# Altium PCB RadioPod_4.PcbDoc
Units mm, origin at the board's own origin, x right, y up, seen from the top; angles counter-clockwise.
Board outline 48.8 x 62.2 mm, 3 copper layers (Top Layer, GND, Bottom Layer), stack 0.488 mm thick; 79 components, 117 nets, 432 pads, 87 vias.
Unrouted connection lines stored in the file: 5.
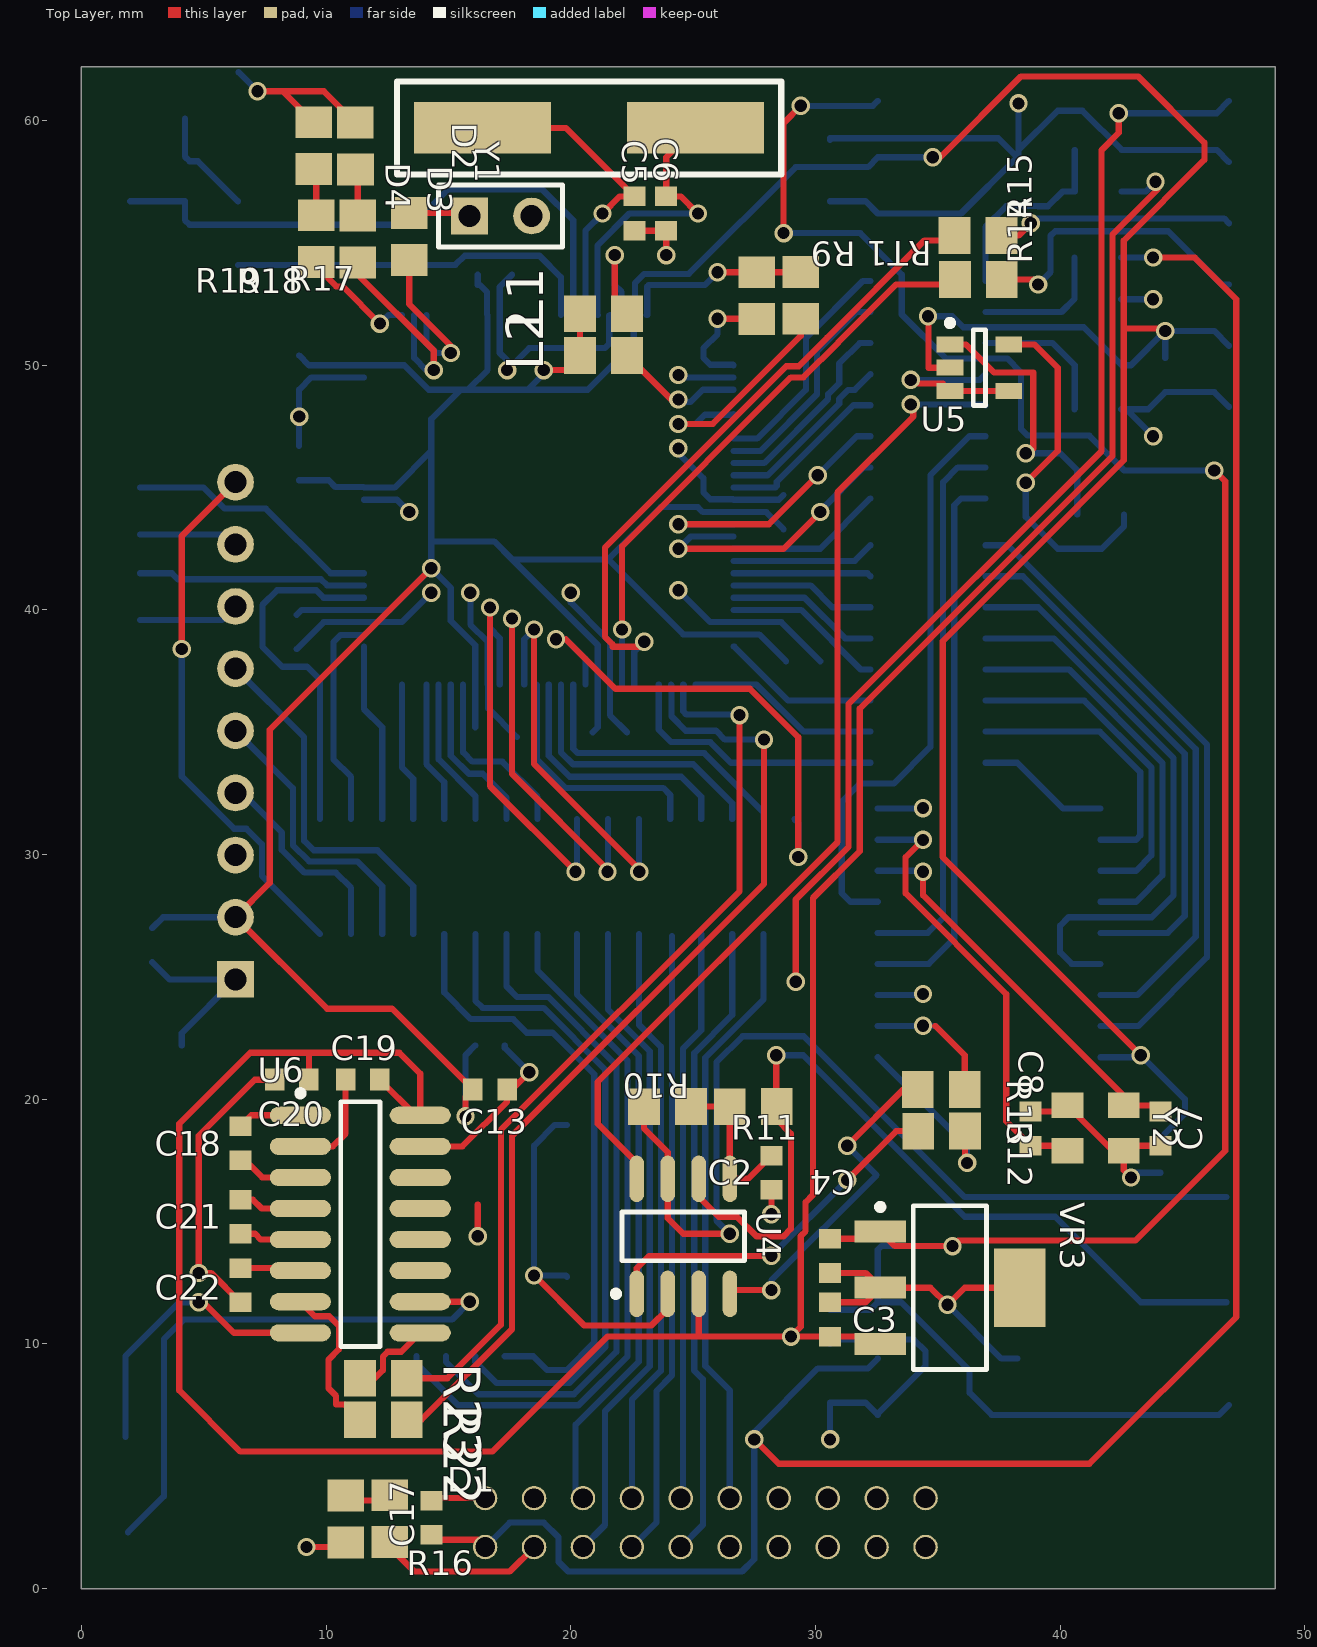
[diagram p0: Top Layer view]
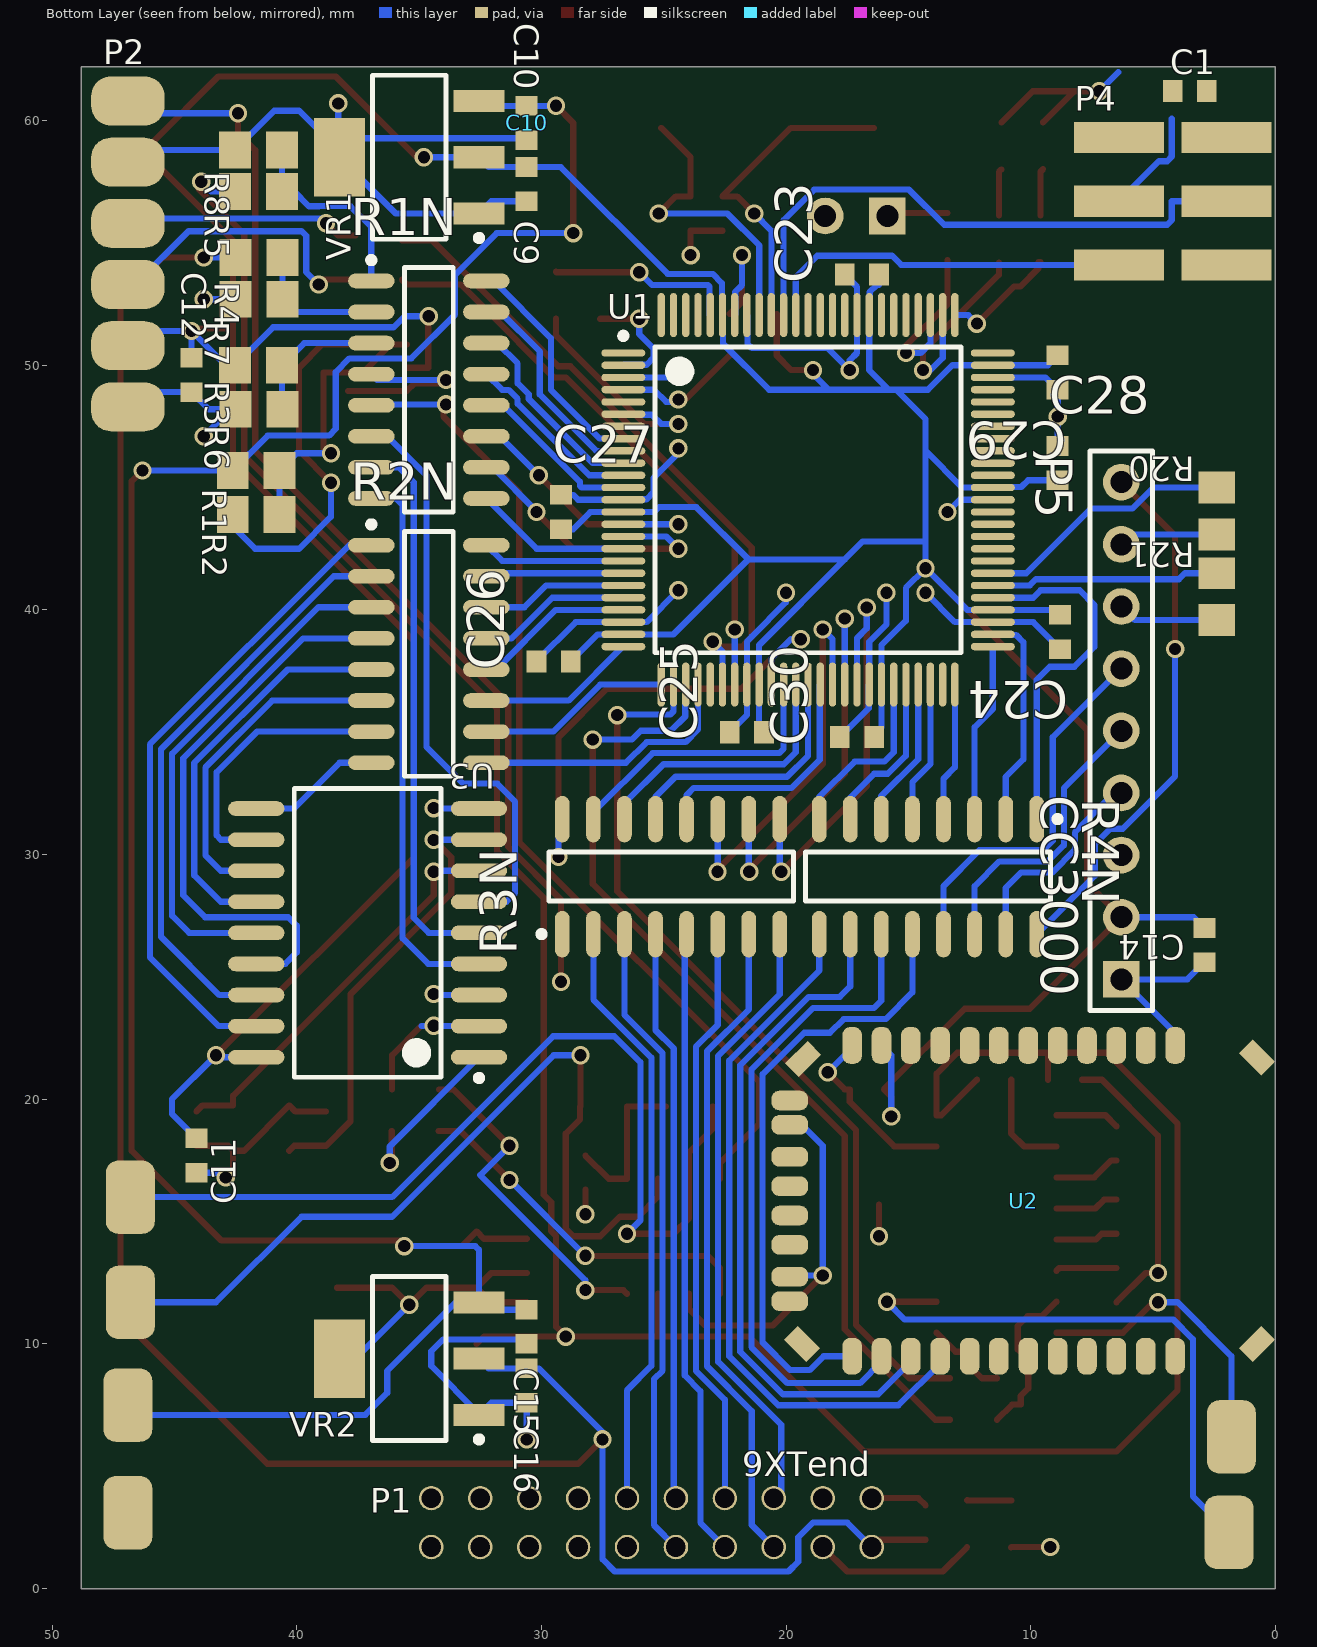
[diagram p1: Bottom Layer view, seen from below]
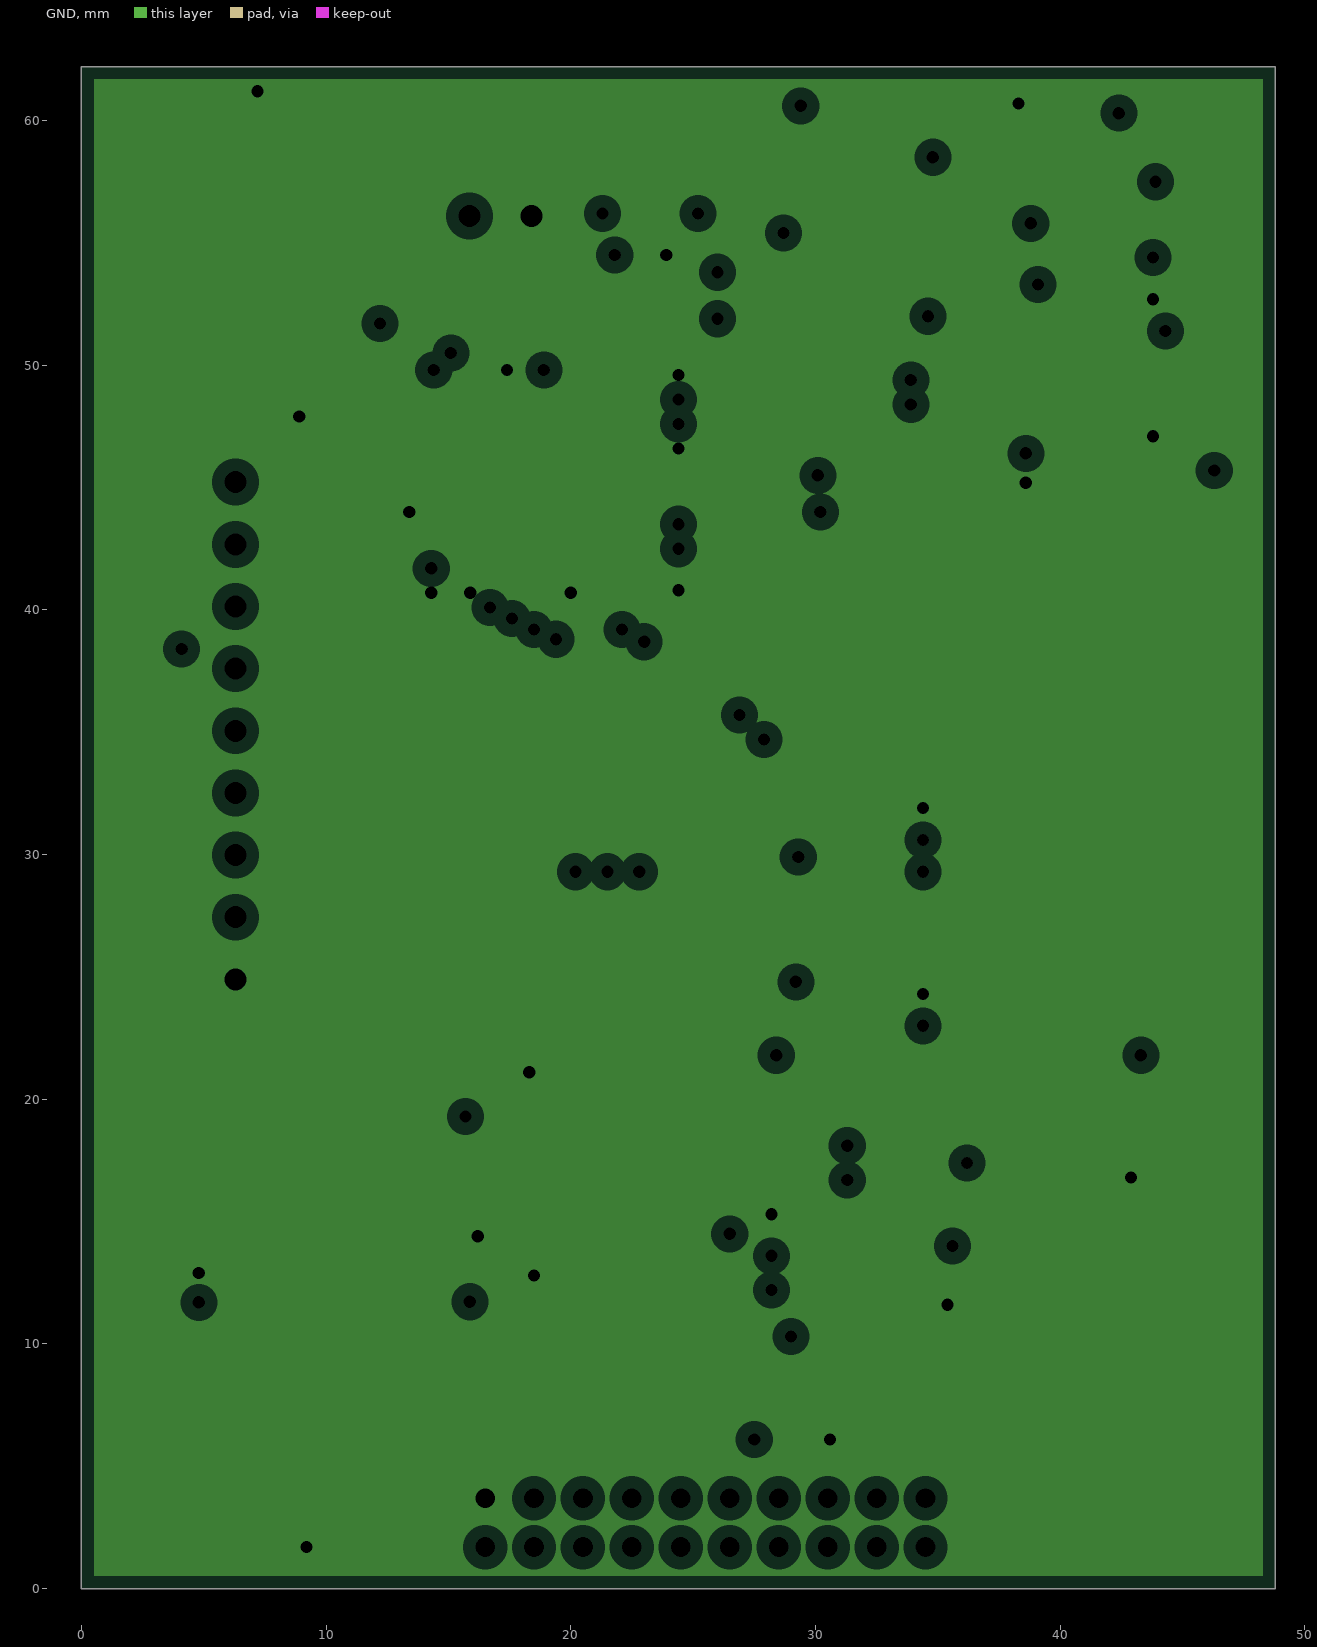
[diagram p2: GND, clearances drawn from the general rule]

## Layer stack, top to bottom
Top Solder: solder mask 0.0102, Solder Resist, Dk 3.5
Top Layer: signal copper 0.0356
Dielectric 1: core 0.254, FR-4, Dk 4.2
GND: plane copper 0.036, net GND
Dielectric 2: prepreg 0.127, Dk 4.2
Bottom Layer: signal copper 0.0356
Bottom Solder: solder mask 0.0102, Solder Resist, Dk 3.5

## Board outline
0,0 0,62.2 48.8,62.2 48.8,0

## Design rules (kind name [scope] priority, off if disabled: settings)
Clearance [All] p1: gap=0.2
PlaneClearance [All] p1: clearance=0.508
PlaneConnect [All] p1: planeconnectstyle=Relief reliefexpansion=0.508 reliefentries=4 reliefconductorwidth=0.254 reliefairgap=0.254
PolygonConnect [All] p1: connectstyle=Relief reliefconductorwidth=0.254 reliefentries=4 polygonreliefangle="90 Angle" airgapwidth=0.254
RoutingVias [All] p1: holewidth=0.711 width=1.27 viastyle="Through Hole" minholewidth=0.711 minwidth=1.27 maxholewidth=0.711 maxwidth=1.27
SolderMaskExpansion [All] p1: expansion=0.102
Width [All] p1: maxlimit=1 minlimit=0.1 preferedwidth=0.254
28 further rules are at their usual default settings.

## Classes and differential pairs
component class RadioPod_3: C1 C2 C3 C4 C5 C6 C7 C8 C9 C10 C11 C12 C13 C14 C15 C16 C17 C18 C19 C20 C21 C22 C23 C24 C25 C26 C27 C28 C29 C30 D1 D2 D3 D4 L1 L2 P1 P2 P4 P5 R1 R1N R2 R2N R3N R4N R9 R10 R11 R22 R23 RT1 U1 U2 U4 U5 U6 VR1 VR2 VR3 Y1 Y2

## Components (designator, comment, footprint, x,y, rotation, side; value= is the part's Value field where it differs from the comment)
C1 "Cap Semi" 1608[0603] 3.5,61.2 r0 bottom
C2 "Cap Semi" 1608[0603] 28.2,17 r90 top
C3 "Cap Semi" 1608[0603] 30.6,11 r90 top
C4 "Cap Semi" 1608[0603] 30.6,13.6 r270 top
C5 "Cap Semi" 1608[0603] 22.6,56.2 r270 top
C6 "Cap Semi" 1608[0603] 23.9,56.2 r270 top
C7 "Cap Semi" 1608[0603] 44.1,18.8 r270 top
C8 "Cap Semi" 1608[0603] 38.8,18.8 r90 top
C9 "Cap Semi" 1608[0603] 30.6,57.4 r270 bottom
C10 "Cap Semi" 1608[0603] 30.6,59.9 r270 bottom
C11 "Cap Semi" 1608[0603] 44.1,17.7 r270 bottom
C12 "Cap Semi" 1608[0603] 44.3,49.6 r270 bottom
C13 "Cap Semi" 1608[0603] 16.7,20.4 r0 top
C14 "Cap Semi" 1608[0603] 2.9,26.3 r270 bottom
C15 "Cap Semi" 1608[0603] 30.6,10.7 r90 bottom
C16 "Cap Semi" 1608[0603] 30.6,8.3 r90 bottom
C17 "Cap Semi" 1608[0603] 14.3,2.9 r270 top
C18 "Cap Semi" 1608[0603] 6.5,18.2 r90 top
C19 "Cap Semi" 1608[0603] 11.5,20.8 r0 top
C20 "Cap Semi" 1608[0603] 8.6,20.8 r0 top
C21 "Cap Semi" 1608[0603] 6.5,15.2 r90 top
C22 "Cap Semi" 1608[0603] 6.5,12.4 r90 top
C23 "Cap Semi" 1608[0603] 16.9,53.7 r0 bottom
C24 "Cap Semi" 1608[0603] 8.8,39.1 r270 bottom
C25 "Cap Semi" 1608[0603] 21.6,35 r0 bottom
C26 "Cap Semi" 1608[0603] 29.5,37.9 r0 bottom
C27 "Cap Semi" 1608[0603] 29.2,44 r90 bottom
C28 "Cap Semi" 1608[0603] 8.9,46 r90 bottom
C29 "Cap Semi" 1608[0603] 8.9,49.7 r270 bottom
C30 "Cap Semi" 1608[0603] 17.1,34.8 r0 bottom
D1 "LED2" 2012[0805]_LED 11.55,4.45 r180 top
D2 "AMBER" hdr1x2 15.86,56.1 r0 top
D3 "RED" 2012[0805]_LED 10.45,57.35 r0 top
D4 "YELLOW" 2012[0805]_LED 8.748,57.366 r0 top
L1 "Inductor" 2012[0805]_IND 22.95,51.35 r90 top
L2 "Inductor" 2012[0805]_IND 22.95,49.65 r90 top
P1 "9XTend" "9XTend Header" 35,4.2 r270 bottom
P2 "EM-506" EM_506 48.4,47.3 r180 bottom
P4 "ISP Header" "ISP HEADER" 4.2,56.7 r90 bottom
P5 "CC3000" HDR1X9 6.3,24.9 r90 bottom
R1 "Res3" 2012[0805]_RES 43.366,46.548 r270 bottom
R1N "4816P" SOIC16_L 34.6,49 r180 bottom
R2 "Res3" 2012[0805]_RES 43.366,44.75 r270 bottom
R2N "4816P" SOIC16_L 34.6,38.2 r180 bottom
R3 "Res3" 2012[0805]_RES 43.266,50.848 r270 bottom
R3N "4816P" SOIC16_L 24.7,29.1 r90 bottom
R4 "Res3" 2012[0805]_RES 43.25,55.25 r270 bottom
R4N "4816P" SOIC16_L 14.2,29.1 r270 bottom
R5 "Res3" 2012[0805]_RES 43.266,57.948 r270 bottom
R6 "Res3" 2012[0805]_RES 43.25,49.05 r270 bottom
R7 "Res3" 2012[0805]_RES 43.25,53.55 r270 bottom
R8 "Res3" 2012[0805]_RES 43.266,59.648 r270 bottom
R9 "Res3" 2012[0805]_RES 28.45,54.55 r180 top
R10 "Res3" 2012[0805]_RES 22.25,20.55 r270 top
R11 "Res3" 2012[0805]_RES 29.166,18.852 r90 top
R12 "Res3" 2012[0805]_RES 36.866,17.85 r90 top
R13 "Res3" 2012[0805]_RES 36.85,19.552 r90 top
R14 "Res3" 2012[0805]_RES 38.366,52.652 r90 top
R15 "Res3" 2012[0805]_RES 38.35,54.45 r90 top
R16 "Res3" 2012[0805]_RES 11.75,1.15 r0 top
R17 "Res3" 2012[0805]_RES 12.55,53.55 r0 top
R18 "Res3" 2012[0805]_RES 10.45,53.45 r0 top
R19 "Res3" 2012[0805]_RES 8.748,53.466 r0 top
R20 "Res3" 2012[0805]_RES 1.55,45.75 r0 bottom
R21 "Res3" 2012[0805]_RES 1.55,42.25 r0 bottom
R22 "Res3" 2012[0805]_RES 10.634,7.748 r270 top
R23 "Res3" 2012[0805]_RES 10.634,9.448 r270 top
RT1 "Res Thermal" 2012[0805]_RES 30.248,54.566 r180 top
U1 "ATxmega128A1-AU" 100A_N 19.1,44.5 r180 bottom
U2 "RN-41" RN41 20.1,22.45 r270 bottom
U3 "MCP2515-I/SO" SOIC-SO18_N 37.1,26.8 r0 bottom
U4 "TJA1040" SO8_L 24.6,14.4 r90 top
U5 "MCP6001UT" SOT-23-OT5_N 36.7,49.9 r0 top
U6 "MAX232D" D016_M 11.4,14.9 r0 top
VR1 "NCV1117ST33T3G" SOT223_L 35.4,58.5 r0 bottom
VR2 "NCV1117ST33T3G" SOT223_L 35.4,9.4 r0 bottom
VR3 "UA78M05IDCY" SOT223_L 35.5,12.3 r0 top
Y1 "16MHz" CRYSTAL 13.6,58.65 r0 top
Y2 "20MHz" MCP2515_XTAL 43.426,17.216 r90 top

## Footprints (in the part's own frame and the unit in brackets; to place one, negate y for a bottom-side part, rotate by r counter-clockwise, add the part's x,y. Pads: shape width x height; smd on the part's side, far side on the other; paste and mask are expansions set on the pad)
"9XTend Header" [mm]
  round 1 hole 0.8: P1(0.5,18.5) P2(2.5,18.5) P3(0.5,16.5) P4(2.5,16.5) P5(0.5,14.5) P6(2.5,14.5) P7(0.5,12.5) P8(2.5,12.5) P9(0.5,10.5) P10(2.5,10.5) P11(0.5,8.5) P12(2.5,8.5) P13(0.5,6.5) P14(2.5,6.5) P15(0.5,4.5) P16(2.5,4.5) P17(0.5,2.5) P18(2.5,2.5) P19(0.5,0.5) P20(2.5,0.5)
100A_N [mm] "Thin QFP, 100-Leads, Body 14x14mm, Pitch 0.5mm, IPC Medium Density"
  oval 1.8x0.3 smd: 1(-7.55,6) 2(-7.55,5.5) 3(-7.55,5) 4(-7.55,4.5) 5(-7.55,4) 6(-7.55,3.5) 7(-7.55,3) 8(-7.55,2.5) 9(-7.55,2) 10(-7.55,1.5) 11(-7.55,1) 12(-7.55,0.5) 13(-7.55,0) 14(-7.55,-0.5) 15(-7.55,-1) 16(-7.55,-1.5) 17(-7.55,-2) 18(-7.55,-2.5) 19(-7.55,-3) 20(-7.55,-3.5) 21(-7.55,-4) 22(-7.55,-4.5) 23(-7.55,-5) 24(-7.55,-5.5) 25(-7.55,-6) 51(7.55,-6) 52(7.55,-5.5) 53(7.55,-5) 54(7.55,-4.5) 55(7.55,-4) 56(7.55,-3.5) 57(7.55,-3) 58(7.55,-2.5) 59(7.55,-2) 60(7.55,-1.5) 61(7.55,-1) 62(7.55,-0.5) 63(7.55,0) 64(7.55,0.5) 65(7.55,1) 66(7.55,1.5) 67(7.55,2) 68(7.55,2.5) 69(7.55,3) 70(7.55,3.5) 71(7.55,4) 72(7.55,4.5) 73(7.55,5) 74(7.55,5.5) 75(7.55,6)
  oval 0.3x1.8 smd: 26(-6,-7.55) 27(-5.5,-7.55) 28(-5,-7.55) 29(-4.5,-7.55) 30(-4,-7.55) 31(-3.5,-7.55) 32(-3,-7.55) 33(-2.5,-7.55) 34(-2,-7.55) 35(-1.5,-7.55) 36(-1,-7.55) 37(-0.5,-7.55) 38(0,-7.55) 39(0.5,-7.55) 40(1,-7.55) 41(1.5,-7.55) 42(2,-7.55) 43(2.5,-7.55) 44(3,-7.55) 45(3.5,-7.55) 46(4,-7.55) 47(4.5,-7.55) 48(5,-7.55) 49(5.5,-7.55) 50(6,-7.55) 76(6,7.55) 77(5.5,7.55) 78(5,7.55) 79(4.5,7.55) 80(4,7.55) 81(3.5,7.55) 82(3,7.55) 83(2.5,7.55) 84(2,7.55) 85(1.5,7.55) 86(1,7.55) 87(0.5,7.55) 88(0,7.55) 89(-0.5,7.55) 90(-1,7.55) 91(-1.5,7.55) 92(-2,7.55) 93(-2.5,7.55) 94(-3,7.55) 95(-3.5,7.55) 96(-4,7.55) 97(-4.5,7.55) 98(-5,7.55) 99(-5.5,7.55) 100(-6,7.55)
  silkscreen extent -7.68,-6.25 6.25,6.82, body extent -7,-7 7,7, height 1.2
1608[0603] [mm] "Chip Capacitor, Body 1.6x0.8mm, IPC High Density"
  rect 0.8x0.9 smd: 1(-0.7,0) 2(0.7,0)
  body extent -0.87,-0.48 0.87,0.48, height 1.3
2012[0805]_IND [mm]
  rect 1.5x1.3 smd: 1(0.75,0.65) 2(0.748,2.566)
  body extent 0.1,0.2 1.4,3, height 1.5
2012[0805]_LED [mm]
  rect 1.5x1.3 smd: 1(0.75,0.65) 2(0.748,2.566)
  body extent 0.1,0.2 1.4,3, height 1
2012[0805]_RES [mm] "2012[0805] Resistor"
  rect 1.5x1.3 smd: 1(0.85,0.75) 2(0.848,2.666)
  body extent 0.2,0.3 1.5,3.1, height 0.5
CRYSTAL [mm]
  rect 5.6x2.1 smd: 1(2.8,1.05) 2(11.5,1.05)
  silkscreen extent -0.7,-0.85 15,2.95, body extent 1.28,-0.85 13.23,2.95, height 4
D016_M [mm] "SOIC, 16-Leads, Body 9.9x3.9mm, Pitch 1.27mm, IPC Low Density"
  oval 2.5x0.7 smd: 1(-2.45,4.445) 2(-2.45,3.175) 3(-2.45,1.905) 4(-2.45,0.635) 5(-2.45,-0.635) 6(-2.45,-1.905) 7(-2.45,-3.175) 8(-2.45,-4.445) 9(2.45,-4.445) 10(2.45,-3.175) 11(2.45,-1.905) 12(2.45,-0.635) 13(2.45,0.635) 14(2.45,1.905) 15(2.45,3.175) 16(2.45,4.445)
  silkscreen extent -2.57,-5 0.8,5.47, body extent -2,-5 2,5, height 1.75
EM_506 [mm]
  rrect80% 3x2 smd: A1(1.5,1) A2(1.5,3.5) A3(1.5,6) A4(1.5,8.5) A5(1.5,11) A6(1.5,13.5)
hdr1x2 [mm] "Connector; Header; 2 Position"
  rect 1.5x1.5 hole 0.9: 1(0,0)
  round 1.5 hole 0.9: 2(2.54,0)
  silkscreen extent -1.27,-1.27 3.81,1.27
HDR1X9 [mm] "Connector; Header; 9 Position"
  rect 1.5x1.5 hole 0.9: 1(0,0)
  round 1.5 hole 0.9: 2(2.54,0) 3(5.08,0) 4(7.62,0) 5(10.16,0) 6(12.7,0) 7(15.24,0) 8(17.78,0) 9(20.32,0)
  silkscreen extent -1.27,-1.27 21.59,1.27
"ISP HEADER" [mm]
  rect 1.27x3.68 smd: 1(-2.6,2.2) 2(0,2.2) 3(2.6,2.2) 4(-2.6,-2.2) 5(0,-2.2) 6(2.6,-2.2)
  body extent -3.75,-2.5 3.75,2.5, height 10
MCP2515_XTAL [mm]
  rect 1.05x1.3 smd: 1(0.684,3.126) 2(2.534,0.826) 3(0.684,0.826) 4(2.534,3.126)
RN41 [mm]
  rrect80% 1.5x0.8 smd: 1(0.25,16) 2(0.25,14.8) 3(0.25,13.6) 4(0.25,12.4) 5(0.25,11.2) 6(0.25,10) 7(0.25,8.8) 8(0.25,7.6) 9(0.25,6.4) 10(0.25,5.2) 11(0.25,4) 12(0.25,2.8) 13(12.95,2.8) 14(12.95,4) 15(12.95,5.2) 16(12.95,6.4) 17(12.95,7.6) 18(12.95,8.8) 19(12.95,10) 20(12.95,11.2) 21(12.95,12.4) 22(12.95,13.6) 23(12.95,14.8) 24(12.95,16)
  rrect80% 0.8x1.5 smd: 28(9.7,0.25) 29(3.5,0.25) 30(10.7,0.25) 31(8.4,0.25) 32(7.2,0.25) 33(6,0.25) 34(4.8,0.25) 35(2.5,0.25)
  rect 0.8x1.3 smd rot 135: SH1(0.75,19.35) SH3(12.45,0.75)
  rect 0.8x1.3 smd rot 45: SH2(0.8,0.8) SH4(12.45,19.35)
  body extent 1,1 12.2,25.8, height 1
SO8_L [mm] "SOIC, 8-Leads, Body 4.9x3.9mm, Pitch 1.27mm, IPC High Density"
  oval 1.9x0.6 smd: 1(-2.35,1.905) 2(-2.35,0.635) 3(-2.35,-0.635) 4(-2.35,-1.905) 5(2.35,-1.905) 6(2.35,-0.635) 7(2.35,0.635) 8(2.35,1.905)
  silkscreen extent -2.47,-2.5 1,2.88, body extent -2,-2.5 2,2.5, height 1.75
SOIC16_L [mm] "SOIC, 16-Leads, Body 9.9x3.9mm, Pitch 1.27mm, IPC High Density"
  oval 1.9x0.6 smd: 1(-2.35,4.445) 2(-2.35,3.175) 3(-2.35,1.905) 4(-2.35,0.635) 5(-2.35,-0.635) 6(-2.35,-1.905) 7(-2.35,-3.175) 8(-2.35,-4.445) 9(2.35,-4.445) 10(2.35,-3.175) 11(2.35,-1.905) 12(2.35,-0.635) 13(2.35,0.635) 14(2.35,1.905) 15(2.35,3.175) 16(2.35,4.445)
  silkscreen extent -2.48,-5 1,5.42, body extent -2,-5 2,5, height 1.91
SOIC-SO18_N [mm] "SOIC, 18-Leads, Body 11.5x7.5mm, Pitch 1.27mm, IPC Medium Density"
  oval 2.3x0.6 smd: 1(-4.55,5.08) 2(-4.55,3.81) 3(-4.55,2.54) 4(-4.55,1.27) 5(-4.55,0) 6(-4.55,-1.27) 7(-4.55,-2.54) 8(-4.55,-3.81) 9(-4.55,-5.08) 10(4.55,-5.08) 11(4.55,-3.81) 12(4.55,-2.54) 13(4.55,-1.27) 14(4.55,0) 15(4.55,1.27) 16(4.55,2.54) 17(4.55,3.81) 18(4.55,5.08)
  silkscreen extent -4.67,-5.9 3,6.05, body extent -3.8,-5.95 3.8,5.95, height 2.65
SOT223_L [mm] "SOT223, 4-Leads, Body 6.5x3.5mm, Pitch 2.3mm, Lead Span 7mm, IPC High Density"
  rect 2.1x0.9 smd: 1(-2.85,2.3) 2(-2.85,0) 3(-2.85,-2.3)
  rect 2.1x3.2 smd: 4(2.85,0)
  silkscreen extent -2.97,-3.35 1.5,3.42, body extent -1.85,-3.35 1.85,3.35, height 1.7
SOT-23-OT5_N [mm] "SOT23, 5-Leads, Body 2.9x1.6mm, Pitch 0.95mm, Lead Span 2.7mm, IPC Medium Density"
  rect 1.1x0.65 smd: 1(-1.2,0.95) 2(-1.2,0) 3(-1.2,-0.95) 4(1.2,-0.95) 5(1.2,0.95)
  silkscreen extent -1.32,-1.55 0.25,1.95, body extent -0.9,-1.55 0.9,1.55, height 1.45

## Part data
C1 C2 C3 C4 C5 C6 C7 C8 C9 C10 C11 C12 C13 C14 C15 C16 C17 C18 C19 C20 C21 C22 C23 C24 C25 C26 C27 C28 C29 C30: "Capacitor (Semiconductor SIM Model)"
D1: "Typical RED, GREEN, YELLOW, AMBER GaAs LED"
D2: library part LED0, "Typical INFRARED GaAs LED"
D3 D4: library part LED2, "Typical RED, GREEN, YELLOW, AMBER GaAs LED"
P1: "9XTend Header Pins"
P2: "EM-506 GPS Module Pads"
P4: library part "Header 3X2", "Header, 3-Pin, Dual row"
P5: "CC3000 Wifi Module"
R1 R2 R3 R4 R5 R6 R7 R8 R9 R10 R11 R12 R13 R14 R15 R16 R17 R18 R19 R20 R21 R22 R23: "Resistor"
R1N R2N R3N R4N: "Resistor Network SOIC-16 package"
RT1: "Thermistor"
U1: "8/16-bit AVR XMEGA A1 Microcontroller, 1.6-3.6V, 128KB + 8KB Flash, 2KB EEPROM, 8KB SRAM, 100-pin TQFP, Industrial Grade (-40°C to 85°C), Pb-Free"
U2: library part RN41, "RN-41 Bluetooth Module"
U3: "Stand-Alone CAN Controller With SPI Interface, 18-Pin SOIC, Industrial Temperature"
U5: library part MCP6001UT-I/OT, "1 MHz, Low-Power Operational Amplifier, 5-Pin SOT-23, Industrial Temperature, Tape and Reel"
U6: "Dual EIA-232 Driver/Receiver"
Y1 Y2: library part XTAL, "Crystal Oscillator"

## Free pads (board coordinates)
  rrect50% 2x3 smd far side: 0(46.9,3.1) 1(46.9,7.5) 2(46.8,11.7) 3(46.8,16) 6(1.9,2.3) 7(1.8,6.2)

## Via types
v1: diameter 0.75, hole 0.5, Top Layer to Bottom Layer, 87 vias

## Nets (pads, with @x,y where several pads share a name; then routed paths per layer and width w, separated by ;. In a path a pad name is that pad's centre, name@x,y a point inside that pad or via, vN(x,y) a via of type N, cw(c..) or ccw(c..) an arc to the next point about the centre after c; other vN are vias at no path point)
CANH: pad.3 R10.1 U4.7 | length 39
  Top Layer w0.254: R10.1 23,18.8 23.965,17.835 U4.7 23.965,15.135 24.6,14.5 v1(26.5,14.5)
  Bottom Layer w0.254: v1(26.5,14.5) 25.954,15.046 25.954,21.512 27.021,22.579 29.521,22.579 36.1,16 pad.3
CANL: pad.2 R11.1 U4.6 | length 35.2
  Top Layer w0.254: U4.6 25.235,16.011 26.046,15.2 26.207,15.2 26.209,15.202 26.791,15.202 27.593,14.4 28.7,14.4 29,14.7 29,18.6 28.416,19.184 R11.1 28.4,19.718 v1(28.4,21.8)
  Bottom Layer w0.254: v1(28.4,21.8) 29.5,21.8 36.1,15.2 39.8,15.2 43.3,11.7 pad.2
GLV: C4.1 C10.1 C15.2 pad.1 R1.1 VR1.3 VR2.3 VR3.1 | length 103.1
  Top Layer w0.254: v1(28.7,55.4) 28.7,59.9 v1(29.4,60.6) ; C4.1 32.35,14.3 VR3.1 33.25,14 v1(35.6,14) 35.827,14.227 43.073,14.227 46.746,17.9 46.746,45.254 v1(46.3,45.7)
  Bottom Layer w0.254: v1(28.7,55.4) 31.832,55.4 33.527,53.705 33.527,52.073 35.322,50.278 37.844,50.278 38.4,49.722 38.4,47.4 38.675,47.125 41.189,47.125 R1.1 46.298,45.698 v1(46.3,45.7) ; v1(29.4,60.6) C10.1 32.35,60.6 VR1.3 ; C15.2 32.25,11.4 VR2.3 ; v1(35.6,14) 32.7,14 32.55,13.85 VR2.3 ; pad.1 46.5,7.1 37.7,7.1 37.2,7.1 36.3,8 36.3,8.9 33.5,11.7 VR2.3
GND: C1.1 C2.1 C3.2 C4.2 C5.2 C6.2 C7.2 C8.2 C9.2 C10.2 C11.2 C12.2 C13.2 C14.2 C15.1 C16.1 C17.1 C20.1 C22.1 C23.2 C24.2 C25.2 C26.2 C27.2 C28.2 C29.2 C30.2 D1.2 D2.2 D3.2 D4.2 P1.P1 P2.A1 P2.A5 P4.6 P5.1 R2.1 R6.1 R7.1 R8.1 U1.3 U1.13 U1.23 U1.33 U1.43 U1.53 U1.63 U1.73 U1.84 U1.93 U2.1 U2.12 U2.28 U2.29 U3.3 U3.9 U4.2 U5.5 U6.15 VR1.1 VR1.4 VR2.1 VR2.4 VR3.2 VR3.4 Y2.3 Y2.4 | length 200.4
  Top Layer w0.254: C22.1 5.3,12.9 v1(4.8,12.9) 4.8,18.512 7.088,20.8 C20.1 ; v1(7.2,61.2) 8.228,61.2 ; v1(9.2,1.7) 10.786,1.7 D1.2@10.802,1.684 ; D4.2 8.228,61.2 ; D3.2 9.914,61.2 8.228,61.2 ; U6.15 15.575,18.075 17.4,19.9 C13.2 17.6,20.4 v1(18.3,21.1) ; C17.1@14.3,3.4 14.6,3.7 P1.P1 ; v1(16.2,14.4) 16.2,15.7 ; v1(18.5,12.8) 20.546,10.754 23.3,10.754 23.965,11.419 U4.2 ; C5.2 C6.2 v1(23.9,54.5) ; v1(28.2,15.3) C2.1 ; C3.2 32.05,11.7 VR3.2 ; C4.2 32.05,12.9 VR3.2 ; U5.5 38.95,50.85 39.9,49.9 39.9,46.5 v1(38.6,45.2) ; VR3.4 36.1,12.3 v1(35.4,11.6) 34.7,12.3 VR3.2 ; C8.2 40.05,19.5 Y2.4 42.15,17.9 Y2.3 ; v1(42.9,16.8) 42.6,17.1 Y2.3 ; C7.2 42.8,18.1 Y2.3
  Bottom Layer w0.254: C14.2 3.6,24.9 P5.1 4.1,22.7 U2.1 ; 6.423,61.977 v1(7.2,61.2) ; C24.2 9.9,39.5 U1.53 13.1,39.5 v1(14.3,40.7) ; C28.2 v1(8.9,47.9) C29.2 9.4,49.5 U1.73 ; U1.63 12.9,44.5 v1(13.4,44) ; v1@15.898,40.6 15.898,39.402 16.6,38.7 U1.43 16.623,36.927 16.623,35.977 C30.2 ; U2.12 17.3,22.1 v1(18.3,21.1) ; C23.2 17.1,53.2 U1.84 17.1,50.5 17.4,50.2 v1(17.4,49.8) 18.3,50.7 21.392,50.7 21.577,50.885 21.577,52.027 U1.93 ; U2.28 19.8,12.8 v1(18.5,12.8) 18.5,18.1 19.35,18.95 U2.29 ; v1(20.004,40.696) 20.004,40.304 21.398,38.909 21.6,38.707 U1.33 21.6,35.7 C25.2 ; v1@24.3,49.5 U1.3 ; v1(24.4,40.8) 25.7,39.5 U1.23 28.6,39.5 C26.2 ; v1@24.4,46.7 24.4,46.4 25.423,45.377 25.423,44.802 25.702,44.523 26.627,44.523 U1.13 28.5,44.5 28.7,44.7 ; v1(30.6,6.1) C16.1 32.05,7.6 VR2.1 32.55,7.15 34.5,9.1 34.5,9.7 34.023,10.177 30.6,10.177 C15.1 ; C9.2 32.05,56.7 VR1.1 35.95,56.2 VR1.4 ; C10.2 30.6,59.277 37.473,59.277 VR1.4 ; U3.3 34.36,24.26 v1(34.4,24.3) ; U3.9 34.38,31.88 v1(34.4,31.9) ; v1@35.5,11.7 v1(35.4,11.6) 37.6,9.4 VR2.4 ; v1(38.3,60.7) VR1.4@38.3,58.8 ; v1(38.6,45.2) 38.6,43.8 39.9,42.5 41.7,42.5 42.616,43.416 R2.1 ; R6.1 R6.1@42.7,48.2 ; R7.1 v1(43.8,52.7) ; v1(42.9,16.8) 43.1,17 C11.2 ; v1(43.8,47.1) R6.1@42.7,48.2 ; P2.A1 46.3,48.9 C12.2 43.6,48.2 R6.1@42.7,48.2 ; P2.A5 46.402,58.798 R8.1 40.914,60.4 39.9,60.4 VR1.4@38.3,58.8 ; VR1.4 38.3,58.55 VR1.4@38.3,58.8
  other v1: 15.898,40.7 24.4,46.6 24.4,49.6
NetC2_2: C2.2 R10.2 R11.2 U4.5 | length 6.6
  Top Layer w0.254: R10.2 26.498,19.702 R11.2 26.5,16.755 U4.5 27.25,16.75 C2.2
NetC5_1: C5.1 U1.91 Y1.1 | length 13.4
  Top Layer w0.254: Y1.1 19.8,59.7 C5.1 22,56.9 v1(21.3,56.2)
  Bottom Layer w0.254: U1.91 20.6,55.5 v1(21.3,56.2)
NetC6_1: C6.1 U1.92 Y1.2 | length 12.4
  Top Layer w0.254: Y1.2 23.9,58.5 C6.1 24.5,56.9 v1(25.2,56.2)
  Bottom Layer w0.254: U1.92 21.098,52.052 21.098,54.898 22.4,56.2 v1(25.2,56.2)
NetC7_1: C7.1 U3.7 Y2.2 | length 16.4
  Top Layer w0.254: v1(34.4,29.3) 34.4,28.342 42.6,20.142 Y2.2 43.85,19.75 C7.1
  Bottom Layer w0.254: U3.7 34.36,29.34 v1(34.4,29.3)
NetC8_1: C8.1 U3.8 Y2.1 | length 18.3
  Top Layer w0.254: v1(34.4,30.6) 33.688,29.888 33.688,28.412 37.8,24.3 37.8,19.1 C8.1 40.1,18.1 Y2.1
  Bottom Layer w0.254: U3.8 34.39,30.61 v1(34.4,30.6)
NetC18_1: C18.1 U6.3 | length 2.7
  Top Layer w0.254: C18.1 6.7,17.5 7.395,16.805 U6.3
NetC18_2: C18.2 U6.1 | length 2.6
  Top Layer w0.254: C18.2 6.945,19.345 U6.1
NetC19_1: C19.1 U6.2 | length 4.3
  Top Layer w0.254: U6.2 10.275,18.075 10.8,18.6 C19.1
NetC21_1: C21.1 U6.5 | length 2.5
  Top Layer w0.254: C21.1 7.1,14.5 7.335,14.265 U6.5
NetC21_2: C21.2 U6.4 | length 2.6
  Top Layer w0.254: C21.2 7,15.9 7.365,15.535 U6.4
NetC22_2: C22.2 U6.6 | length 2.5
  Top Layer w0.254: C22.2 8.845,13.1 U6.6
NetD1_1: D1.1 R16.2 | length 1.8
  Top Layer w0.254: D1.1@10.8,3.6 12.582,3.6 R16.2@12.598,3.616
NetD2_1: D2.1 R17.2 | length 2.5
  Top Layer w0.254: R17.2 15.744,56.216 D2.1
NetD3_1: D3.1 R18.2 | length 1.9
  Top Layer w0.254: D3.1 11.298,57.902 R18.2
NetD4_1: D4.1 R19.2 | length 1.9
  Top Layer w0.254: D4.1 9.596,57.918 R19.2
NetL1_1: L1.1 U1.94 | length 4.8
  Top Layer w0.254: v1@21.8,54.3 21.8,52.6 L1.1
  Bottom Layer w0.254: v1@21.8,54.3 21.8,53.275 22.077,52.998 22.077,52.073 U1.94
  other v1: 21.8,54.5
NetL2_1: L2.1 U1.4 | length 5.3
  Top Layer w0.254: L2.1 24.2,48.5 v1@24.3,48.5
  Bottom Layer w0.254: v1@24.3,48.5 24.9,48.5 25.4,49 U1.4
  other v1: 24.4,48.6
NetP1_4: P1.P4 R16.1 | length 6.7
  Top Layer w0.254: R16.1@12.6,1.7 13.6,0.7 17.5,0.7 P1.P4
NetP1_5: P1.P5 R3N.8 | length 25.3
  Bottom Layer w0.254: R3N.8 20.255,24.291 22.776,21.77 22.776,9.276 20.2,6.7 20.2,4 P1.P5
NetP1_6: P1.P6 R3N.7 | length 26.9
  Bottom Layer w0.254: P1.P6 21.4,2.6 21.4,7.258 23.23,9.088 23.23,21.958 21.525,23.663 R3N.7
NetP1_7: P1.P7 R3N.6 | length 23.9
  Bottom Layer w0.254: P1.P7 22.5,7.716 23.684,8.9 23.684,22.146 22.795,23.035 R3N.6
NetP1_8: P1.P8 R3N.5 | length 25.7
  Bottom Layer w0.254: P1.P8 23.5,2.7 23.5,8.074 24.138,8.712 R3N.5@24.138,26.677
NetP1_9: P1.P9 R3N.4 | length 23.4
  Bottom Layer w0.254: P1.P9 24.592,3.792 24.592,22.076 25.335,22.819 R3N.4
NetP1_10: P1.P10 R3N.3 | length 26.2
  Bottom Layer w0.254: P1.P10 25.4,2.6 25.4,8.558 25.046,8.912 25.046,21.888 26.605,23.447 R3N.3
NetP1_11: P1.P11 R3N.2 | length 24.4
  Bottom Layer w0.254: P1.P11 26.5,8.1 25.5,9.1 25.5,21.7 27.875,24.075 R3N.2
NetP2_3: P2.A3 R14.1 | length 12
  Top Layer w0.254: R14.1 38.898,53.502 v1(39.1,53.3)
  Bottom Layer w0.254: v1(39.1,53.3) 39.607,53.807 39.607,55.287 39.799,55.479 44.421,55.479 46.6,53.3 P2.A3
NetP2_4: P2.A4 R15.1 | length 9.7
  Top Layer w0.254: R15.1 38.3,55.3 v1(38.8,55.8)
  Bottom Layer w0.254: v1(38.8,55.8) 39,56 46.7,56 P2.A4
NetP2_6: P2.A6 R3N.1 | length 45.8
  Top Layer w0.254: v1(29.2,24.8) 29.2,28.165 31.356,30.321 31.356,36.156 41.692,46.492 41.692,58.792 42.4,59.5 v1(42.4,60.3) v1@42.4,60.4
  Bottom Layer w0.254: v1(42.4,60.3) 46.4,60.3 P2.A6
NetP4_1: P4.1 U1.89 | length 15.3
  Bottom Layer w0.254: P4.1 15.288,54.1 15.665,54.477 18.723,54.477 19.6,53.6 U1.89
NetP4_5: P4.5 U1.90 | length 23.9
  Bottom Layer w0.254: P4.5 4.233,56.7 4.233,55.93 4.425,55.738 13.536,55.738 14.975,57.177 18.846,57.177 20.1,55.923 U1.90
NetP5_4: P5.4 R4N.15 | length 8.6
  Bottom Layer w0.254: P5.4 6.58,32.52 8.192,30.908 8.192,30.192 9.119,29.265 10.4,29.265 11.025,28.64 R4N.15
NetP5_5: P5.5 R4N.14 | length 11.9
  Bottom Layer w0.254: P5.5 8.646,32.714 8.646,30.38 9.307,29.719 11.281,29.719 12.295,28.705 R4N.14
NetP5_6: P5.6 R4N.13 | length 15.4
  Bottom Layer w0.254: P5.6 9.1,34.8 9.1,30.568 9.495,30.173 12.1,30.173 13.565,28.708 R4N.13
NetP5_7: P5.7 R21.2 | length 4.1
  Bottom Layer w0.254: R21.2 5.744,39.584 P5.7
NetP5_8: P5.8 R20.2 | length 4.1
  Bottom Layer w0.254: R20.2 5.896,43.084 P5.8
NetP5_9: P5.9 R4N.16 | length 22
  Top Layer w0.254: v1(4.1,38.4) 4.1,43.02 P5.9
  Bottom Layer w0.254: v1(4.1,38.4) 4.1,33.197 6.24,31.057 6.746,31.057 7.377,30.426 7.377,29.128 R4N.16
NetR1_2: R1.2 R2.2 U5.1 | length 11.5
  Top Layer w0.254: U5.1 36.15,50.85 37.3,49.7 38.9,49.7 38.9,46.6 38.7,46.4 v1(38.6,46.4)
  Bottom Layer w0.254: v1(38.6,46.4) 40,46.4 R1.2 R2.2
NetR1N_1: R1N.1 R5.2 R8.2 | length 8.2
  Bottom Layer w0.254: R1N.1 36.95,55.65 37.802,56.502 39.091,56.502 39.093,56.5 39.5,56.5 40.1,57.1 R5.2 R8.2
NetR1N_2: R1N.2 R4.2 R7.2 | length 5.6
  Bottom Layer w0.254: R1N.2 40.057,52.175 R7.2 R4.2
NetR1N_3: R1N.3 R3.2 R6.2 | length 5.8
  Bottom Layer w0.254: R1N.3 39.695,50.905 R3.2 40.6,48.218 R6.2
NetR1N_4: R1N.4 U5.3 U5.4 | length 7.1
  Top Layer w0.254: v1@34,49.4 34.152,49.248 35.202,49.248 U5.3 U5.4
  Bottom Layer w0.254: v1@34,49.4 36.715,49.4 R1N.4
  other v1: 33.9,49.4
NetR1N_5: R1N.5 U4.8 | length 40.6
  Top Layer w0.254: U4.8 22.695,17.405 21.1,19 21.1,20.707 30.902,30.509 30.902,44.802 34,47.9 v1@34,48.4
  Bottom Layer w0.254: v1@34,48.4 36.915,48.4 R1N.5
  other v1: 33.9,48.4
NetR1N_6: R1N.6 U3.6 | length 23.9
  Bottom Layer w0.254: U3.6 31.43,28.07 31.073,28.427 31.073,32.167 31.806,32.9 33.2,32.9 34.7,34.4 34.7,45.5 36.295,47.095 R1N.6
NetR1N_7: R1N.7 U3.5 | length 22.7
  Bottom Layer w0.254: U3.5 34.6,26.8 35.219,27.419 35.219,45.219 35.825,45.825 R1N.7
NetR1N_8: R1N.8 U3.4 | length 22.6
  Bottom Layer w0.254: U3.4 34.63,25.53 35.673,26.573 35.673,44.273 35.955,44.555 R1N.8
NetR1N_9: R1N.9 U1.17 | length 6.5
  Bottom Layer w0.254: U1.17 30.195,42.5 R1N.9
NetR1N_10: R1N.10 U1.16 | length 11.7
  Top Layer w0.254: v1(24.4,42.5) 28.7,42.5 v1(30.2,44)
  Bottom Layer w0.254: v1(24.4,42.5) 24.9,43 U1.16 ; v1(30.2,44) 30.2,44.042 31.983,45.825 R1N.10
NetR1N_11: R1N.11 U1.15 | length 11.6
  Top Layer w0.254: v1(24.4,43.5) 28.1,43.5 v1(30.1,45.5)
  Bottom Layer w0.254: v1(24.4,43.5) U1.15 ; v1(30.1,45.5) 31.695,47.095 R1N.11
NetR1N_12: R1N.12 U1.12 | length 7.1
  Bottom Layer w0.254: U1.12 28.358,45 28.423,45.065 28.423,45.235 31.553,48.365 R1N.12
NetR1N_13: R1N.13 U1.11 | length 7.4
  Bottom Layer w0.254: U1.11 28.046,45.5 30.973,48.427 30.973,48.625 31.34,48.992 31.607,48.992 R1N.13
NetR1N_14: R1N.14 U1.10 | length 8.2
  Bottom Layer w0.254: U1.10 27.9,46 30.519,48.619 30.519,48.813 30.973,49.267 30.973,50.073 31.805,50.905 R1N.14
NetR1N_15: R1N.15 U1.9 | length 9
  Bottom Layer w0.254: U1.9 27.758,46.5 30.065,48.807 30.065,50.565 31.675,52.175 R1N.15
NetR1N_16: R1N.16 U1.8 | length 9.5
  Bottom Layer w0.254: U1.8 27.616,47 29.611,48.995 29.611,51.111 31.945,53.445 R1N.16
NetR2N_1: R2N.1 U3.17 | length 26.6
  Bottom Layer w0.254: R2N.1 37.855,42.645 46,34.5 46,25.8 43.19,22.99 U3.17
NetR2N_2: R2N.2 U3.16 | length 24.1
  Bottom Layer w0.254: R2N.2 38.483,41.375 45.546,34.312 45.546,26.646 43.16,24.26 U3.16
NetR2N_3: R2N.3 U3.14 | length 21
  Bottom Layer w0.254: R2N.3 39.111,40.105 45.092,34.124 45.092,27.492 44.4,26.8 U3.14
NetR2N_4: R2N.4 U3.15 | length 23.4
  Bottom Layer w0.254: R2N.4 39.739,38.835 44.638,33.936 44.638,28.338 43.743,27.443 40.343,27.443 40,27.1 40,26 40.47,25.53 U3.15
NetR2N_5: R2N.5 U3.13 | length 16.4
  Bottom Layer w0.254: R2N.5 40.367,37.565 44.184,33.748 44.184,29.15 43.104,28.07 U3.13
NetR2N_6: R2N.6 U3.12 | length 13.8
  Bottom Layer w0.254: R2N.6 40.995,36.295 43.73,33.56 43.73,29.966 43.104,29.34 U3.12
NetR2N_7: R2N.7 U3.11 | length 11.3
  Bottom Layer w0.254: R2N.7 41.623,35.025 43.276,33.372 43.276,30.782 43.104,30.61 U3.11
NetR2N_8: R2N.8 U3.10 | length 5.5
  Bottom Layer w0.254: R2N.8 38.245,33.755 40.12,31.88 U3.10
NetR2N_9: R2N.9 U1.29 | length 11.1
  Bottom Layer w0.254: U1.29 23.6,35.108 24.108,34.6 25.7,34.6 26.545,33.755 R2N.9
NetR2N_10: R2N.10 U1.26 | length 7.9
  Bottom Layer w0.254: U1.26 27.592,36.95 29.517,35.025 R2N.10
NetR2N_11: R2N.11 U1.25 | length 6.5
  Bottom Layer w0.254: U1.25 26.684,38.5 28.889,36.295 R2N.11
NetR2N_12: R2N.12 U1.22 | length 6.6
  Bottom Layer w0.254: U1.22 29.412,40 31.847,37.565 R2N.12
NetR2N_13: R2N.13 U1.21 | length 6.3
  Bottom Layer w0.254: U1.21 29.554,40.5 31.219,38.835 R2N.13
NetR2N_14: R2N.14 U1.20 | length 6
  Bottom Layer w0.254: U1.20 29.8,41 30.695,40.105 R2N.14
NetR2N_15: R2N.15 U1.19 | length 5.7
  Bottom Layer w0.254: U1.19 32.125,41.5 R2N.15
NetR2N_16: R2N.16 U1.18 | length 5.9
  Bottom Layer w0.254: U1.18 26.65,42.002 31.607,42.002 R2N.16
NetR3N_9: R3N.9 U1.42 | length 17.7
  Top Layer w0.254: v1(16.7,40.1) 16.7,32.8 v1(20.2,29.3)
  Bottom Layer w0.254: v1(16.7,40.1) 16.7,39.242 17.1,38.842 U1.42 ; v1(20.2,29.3) 20.255,29.355 R3N.9
NetR3N_10: R3N.10 U1.41 | length 16.6
  Top Layer w0.254: v1(17.6,39.643) 17.6,33.3 v1@21.6,29.3
  Bottom Layer w0.254: U1.41 v1@17.6,39.4 ; v1(21.5,29.3) 21.525,29.325 R3N.10
NetR3N_11: R3N.11 U1.40 | length 16.1
  Top Layer w0.254: v1(18.5,39.2) 18.5,33.7 v1@22.8,29.4
  Bottom Layer w0.254: U1.40 18.1,38.8 v1(18.5,39.2) ; R3N.11 22.795,29.305 v1(22.8,29.3)
NetR3N_12: R3N.12 U1.39 | length 10.1
  Bottom Layer w0.254: U1.39 18.623,36.927 18.623,33.877 19.773,32.727 23.773,32.727 24.065,32.435 R3N.12
NetR3N_13: R3N.13 U1.38 | length 10.8
  Bottom Layer w0.254: U1.38 19.1,34.042 19.961,33.181 24.519,33.181 25.335,32.365 R3N.13
NetR3N_14: R3N.14 U1.37 | length 11.3
  Bottom Layer w0.254: U1.37 19.6,34.184 20.092,33.692 25.008,33.692 26.605,32.095 R3N.14
NetR3N_15: R3N.15 U1.36 | length 11.8
  Bottom Layer w0.254: U1.36 20.1,34.326 20.28,34.146 25.454,34.146 27.875,31.725 R3N.15
NetR3N_16: R3N.16 U1.35 | length 19.9
  Top Layer w0.254: 19.8,38.8 21.825,36.775 27.325,36.775 29.3,34.8 v1(29.3,29.9)
  Bottom Layer w0.254: 19.8,38.8 20.6,38 U1.35 ; R3N.16 29.3,31.295 v1(29.3,29.9)
  other v1: 19.4,38.8
NetR4N_1: R4N.1 U1.55 | length 14.8
  Bottom Layer w0.254: R4N.1 9.755,37.145 9.227,37.673 8.215,37.673 7.4,38.488 7.4,40.2 8,40.8 9.6,40.8 9.9,40.5 U1.55
NetR4N_2: R4N.2 U1.52 | length 8.9
  Bottom Layer w0.254: R4N.2 11.025,33.175 10.3,33.9 10.3,38.675 10.602,38.977 11.527,38.977 U1.52
NetR4N_3: R4N.3 U1.51 | length 7.4
  Bottom Layer w0.254: U1.51 11.55,35.95 12.295,35.205 R4N.3
NetR4N_4: R4N.4 U1.50 | length 5.7
  Bottom Layer w0.254: U1.50 13.1,33.565 13.565,33.1 R4N.4
NetR4N_5: R4N.5 U1.48 | length 5.8
  Bottom Layer w0.254: U1.48 14.1,33.7 14.835,32.965 R4N.5
NetR4N_6: R4N.6 U1.47 | length 6.1
  Bottom Layer w0.254: U1.47 14.6,33.9 16.105,32.395 R4N.6
NetR4N_7: R4N.7 U1.46 | length 6.8
  Bottom Layer w0.254: U1.46 15.1,34.042 15.842,33.3 16.4,33.3 17.375,32.325 R4N.7
NetR4N_8: R4N.8 U1.45 | length 7.5
  Bottom Layer w0.254: U1.45 15.6,34.184 15.984,33.8 17.2,33.8 18.645,32.355 R4N.8
NetR4N_9: R4N.9 U2.16 | length 29.2
  Bottom Layer w0.254: U2.16 13.7,9.2 15.408,7.492 20.318,7.492 22.322,9.496 22.322,21.582 18.645,25.259 R4N.9
NetR4N_10: R4N.10 U2.15 | length 28.1
  Bottom Layer w0.254: U2.15 14.9,9.275 16.229,7.946 20.13,7.946 21.868,9.684 21.868,21.394 19.077,24.185 17.8,24.185 17.375,24.61 R4N.10
NetR4N_11: R4N.11 U2.14 | length 27
  Bottom Layer w0.254: U2.14 16.1,9.275 16.975,8.4 19.942,8.4 21.414,9.872 21.414,21.206 18.889,23.731 16.4,23.731 16.105,24.026 R4N.11
NetR4N_12: R4N.12 U2.13 | length 25.2
  Bottom Layer w0.254: R4N.12 14.835,24.365 15.923,23.277 17.648,23.277 18.206,22.719 19.259,22.719 20.96,21.018 20.96,10.06 19.831,8.931 19.038,8.931 18.468,9.5 U2.13
NetR9_1: R9.1 RT1.1 U1.96 | length 7.7
  Top Layer w0.254: v1(26,53.8) R9.1 29.382,53.8 RT1.1
  Bottom Layer w0.254: U1.96 23.123,52.05 23.123,53.215 23.185,53.277 25.477,53.277 v1(26,53.8)
NetR9_2: R9.2 U1.2 | length 4.8
  Top Layer w0.254: v1(26,51.9) 27.586,51.9 R9.2
  Bottom Layer w0.254: v1(26,51.9) 26,51.275 25.423,50.698 25.423,50.302 25.702,50.023 26.627,50.023 U1.2
NetR11_2: 
NetR12_1: R12.1 U3.1 | length 7.2
  Top Layer w0.254: R12.1 36.116,17.484 v1(36.2,17.4)
  Bottom Layer w0.254: U3.1 36.2,18.07 v1(36.2,17.4)
NetR12_2: R12.2 U4.1 | length 14.9
  Top Layer w0.254: U4.1 22.695,13.095 23.2,13.6 v1(28.2,13.6) ; v1(31.3,16.7) 33.298,18.698 R12.2
  Bottom Layer w0.254: v1(28.2,13.6) v1(31.3,16.7)
NetR13_1: R13.1 U3.2 | length 5.4
  Top Layer w0.254: 34.9,23 36.1,21.8 R13.1
  Bottom Layer w0.254: U3.2 32.56,23 34.9,23
  other v1: 34.4,23
NetR13_2: R13.2 U4.4 | length 13.8
  Top Layer w0.254: U4.4 26.655,12.2 v1(28.2,12.2) ; v1(31.3,18.1) 33.6,20.4 R13.2
  Bottom Layer w0.254: v1(28.2,12.2) 28.2,12.6 32.5,16.9 v1(31.3,18.1)
NetR14_2: R14.2 U1.32 | length 23.8
  Top Layer w0.254: v1(22.1,39.2) 22.1,42.6 29,49.5 29.504,49.5 30.931,50.927 30.931,50.931 33.3,53.3 35.5,53.3 R14.2
  Bottom Layer w0.254: U1.32 v1(22.1,39.2)
NetR15_2: R15.2 U1.31 | length 27
  Top Layer w0.254: v1(23,38.7) 22.798,38.498 21.702,38.498 21.702,38.605 21.398,38.909 21.398,42.54 28.812,49.954 29.316,49.954 30.477,51.115 30.477,51.119 34.456,55.098 R15.2@35.684,55.098
  Bottom Layer w0.254: U1.31 22.6,38.3 v1(23,38.7)
NetR17_1: R17.1 U1.78 | length 6.8
  Top Layer w0.254: R17.1 13.4,52.5 15.1,50.8 v1(15.1,50.5)
  Bottom Layer w0.254: U1.78 14.1,50.9 14.5,50.5 v1(15.1,50.5)
NetR18_1: R18.1 U1.77 | length 8.4
  Top Layer w0.254: R18.1 11.3,53.7 14.398,50.602 14.398,49.802 v1(14.4,49.8)
  Bottom Layer w0.254: U1.77 13.6,50.3 14.1,49.8 v1(14.4,49.8)
NetR19_1: R19.1 U1.76 | length 4.8
  Top Layer w0.254: R19.1 9.684,54.216 9.684,53.954 10.415,53.223 10.677,53.223 v1(12.2,51.7)
  Bottom Layer w0.254: v1(12.2,51.7) 12.55,52.05 U1.76
NetR20_1: R20.1 U1.57 | length 10.6
  Bottom Layer w0.254: R20.1 4.997,45 5.854,44.143 7.541,44.143 10.184,41.5 U1.57
NetR21_1: R21.1 U1.56 | length 9.4
  Bottom Layer w0.254: R21.1 3.7,41.5 3.946,41.254 9.788,41.254 10.042,41 U1.56
NetR22_1: R22.1 U6.7 | length 6.7
  Top Layer w0.254: U6.7 9.543,11.132 10.13,11.132 10.527,10.735 10.527,9.778 10.1,9.351 10.1,8.182 10.407,7.875 10.407,7.521 10.761,7.521 R22.1
NetR22_2: R22.2 U1.28 | length 39.7
  Top Layer w0.254: R22.2 13.9,6.9 17.6,10.6 17.6,18.5 27.9,28.8 v1(27.9,34.7)
  Bottom Layer w0.254: U1.28 24.123,36.927 24.123,35.643 24.704,35.062 25.938,35.062 26.3,34.7 v1(27.9,34.7)
NetR23_1: R23.1 U6.9 | length 3.6
  Top Layer w0.254: R23.1 11.993,8.598 12.323,8.928 12.323,9.485 12.515,9.677 13.072,9.677 U6.9
NetR23_2: R23.2 U1.27 | length 37.2
  Top Layer w0.254: R23.2 14.958,8.6 17.146,10.788 17.146,18.746 26.9,28.5 v1(26.9,35.7)
  Bottom Layer w0.254: U1.27@24.623,36.927 U1.27 24.6,35.854 24.731,35.723 26.877,35.723 v1(26.9,35.7)
NetRT1_2: RT1.2 U1.6 | length 9.6
  Top Layer w0.254: v1(24.4,47.6) 25.8,47.6 29.4,51.2 RT1.2
  Bottom Layer w0.254: v1(24.4,47.6) 25.108,47.6 25.485,47.977 26.627,47.977 U1.6
RS232_IN: pad.6 U6.10 | length 23.7
  Top Layer w0.254: U6.10 v1(15.875,11.725)
  Bottom Layer w0.254: pad.6 3.373,3.773 3.373,10.198 4.175,11 4.507,11 4.509,10.998 15.148,10.998 v1(15.875,11.725)
RS232_OUT: pad.7 U6.8 | length 11.9
  Top Layer w0.254: v1(4.8,11.7) 4.988,11.7 6.233,10.455 U6.8
  Bottom Layer w0.254: pad.7 1.8,9.5 4,11.7 v1(4.8,11.7)
VCC_VR1: C1.2 C9.1 C11.1 C12.1 C13.1 C14.1 C23.1 C24.1 C25.1 C26.1 C27.1 C28.1 C29.1 C30.1 L1.2 L2.2 P2.A2 P4.2 P5.2 R3.1 U1.14 U1.24 U1.34 U1.44 U1.54 U1.64 U1.74 U1.83 U1.95 U2.11 U3.18 U5.2 VR1.2 | length 229.8
  Top Layer w0.254: v1(14.3,41.7) 7.7,35.1 7.7,28.84 P5.2 10.04,23.7 12.7,23.7 C13.1 15.7,20.1 v1(15.7,19.3) ; v1(18.9,49.8) 19.786,49.8 L2.2 L1.2 ; v1(34.6,52) 34.623,51.977 34.623,49.9 U5.2 ; v1(34.8,58.5) 35.1,58.5 38.4,61.8 43.2,61.8 45.9,59.1 45.9,58.393 42.6,55.093 42.6,51.5 ; v1(43.3,21.8) 35.2,29.9 35.2,38.716 42.6,46.116 42.6,51.5 ; v1(44.3,51.4) 44.2,51.5 42.6,51.5
  Bottom Layer w0.254: C14.1 3.34,27.44 P5.2 ; 4.233,60.07 4.233,58.53 4.425,58.338 4.762,58.338 P4.2 ; C24.1 9,40 U1.54 12.6,40 v1(14.3,41.7) ; C28.1 10.108,45.3 10.385,45.023 11.527,45.023 U1.64 12.8,45 14.3,46.5 ; C29.1 9.3,50 U1.74 13.2,50 14.2,49 15.5,49 ; v1(15.7,19.3) 15.7,21.8 U2.11 ; C30.1@16.1,35.2 U1.44 16.1,38.558 15.1,39.558 15.1,40.9 v1(14.3,41.7) ; C23.1 16.2,53.277 16.298,53.277 16.577,52.998 16.577,52.073 U1.83 16.6,49.8 15.8,49 ; v1(18.9,49.8) 18.9,49.654 18.246,49 ; C25.1 21.1,35.2 U1.34 21.1,38.565 17.6,42.065 ; 28.7,43.3 28,44 U1.14 25.4,44 25.198,44.202 23.672,44.202 21.535,42.065 ; C26.1 27.7,39 U1.24 24.6,39 21.535,42.065 ; v1(34.6,52) 35.588,52 36.04,51.548 40.966,51.548 R3.1 42.898,49.998 v1(44.3,51.4) ; v1(34.8,58.5) VR1.2 32.15,58.1 C9.1 29.2,58.1 24.831,53.731 22.997,53.731 22.623,53.357 22.623,52.05 U1.95 22.577,52.027 22.577,50.885 20.692,49 18.246,49 ; U3.18 43.38,21.72 45.1,20 45.1,19.4 C11.1 ; C12.1 v1(44.3,51.4) ; P2.A2 46.3,51.4 v1(44.3,51.4) ; v1(14.3,41.7) 14.3,42.8 ; 14.3,42.8 14.3,46.5 ; 14.3,42.8 16.865,42.8 17.6,42.065 ; 14.3,46.5 14.3,47.8 15.5,49 ; 15.5,49 15.8,49 ; 15.8,49 18.246,49 ; 17.6,42.065 21.535,42.065
VCC_VR2: C16.2 C17.2 P1.P2 R4.1 VR2.2 | length 96.5
  Top Layer w0.254: C17.2@14.3,2 16.2,2 P1.P2 ; v1(27.5,6.1) 28.5,5.1 41.2,5.1 47.2,11.1 47.2,52.7 45.5,54.4 v1(43.8,54.4)
  Bottom Layer w0.254: P1.P2 17.5,2.7 18.9,2.7 19.5,2.1 19.5,1.1 19.9,0.7 27,0.7 27.5,1.2 v1(27.5,6.1) 27.5,6.4 30.1,9 C16.2 32.15,9 VR2.2 ; R4.1 v1(43.8,54.4)
VCC_VR3: C3.1 C19.2 C20.2 R5.1 U4.3 U6.16 VR3.3 | length 115.5
  Top Layer w0.254: C20.2 9.3,21.9 ; C19.2 13.655,19.345 U6.16 13.85,21.05 13,21.9 9.3,21.9 ; U4.3 25.235,10.315 25.25,10.3 ; VR3.3 32.35,10.3 C3.1 v1(29,10.3) ; v1@44,57.2 42.146,55.346 42.146,46.304 31.81,35.968 31.81,30.133 29.902,28.225 29.902,16.095 29.6,15.793 29.6,14.612 29.4,14.412 29.4,10.7 v1(29,10.3) ; 9.3,21.9 6.9,21.9 4,19 4,8.1 6.5,5.6 16.8,5.6 21.5,10.3 25.25,10.3 ; 25.25,10.3 v1(29,10.3)
  Bottom Layer w0.254: R5.1 43.498,57.098 v1(43.9,57.5)
pads on no net: P1.P3 P1.P12 P1.P13 P1.P14 P1.P15 P1.P16 P1.P17 P1.P18 P1.P19 P1.P20 P4.3 P4.4 P5.3 U1.1 U1.5 U1.7 U1.30 U1.49 U1.58 U1.59 U1.60 U1.61 U1.62 U1.65 U1.66 U1.67 U1.68 U1.69 U1.70 U1.71 U1.72 U1.75 U1.79 U1.80 U1.81 U1.82 U1.85 U1.86 U1.87 U1.88 U1.97 U1.98 U1.99 U1.100 U2.2 U2.3 U2.4 U2.5 U2.6 U2.7 U2.8 U2.9 U2.10 U2.17 U2.18 U2.19 U2.20 U2.21 U2.22 U2.23 U2.24 U2.30 U2.31 U2.32 U2.33 U2.34 U2.35 U2.SH1 U2.SH2 U2.SH3 U2.SH4 U6.11 U6.12 U6.13 U6.14

## Polygon pours and split planes (outlines as drawn)
GND on GND (split plane): 48.29,0.51 0.51,0.51 0.51,61.69 48.29,61.69

## Silkscreen, mask and mechanical layers (free items; w line width, h text height)
Bottom Overlay:
  text "OUT" at 52.4,88 h1 r90
  text "RS232" at 48.8,87.1 h1 r90
  text "IN" at 52.4,83.8 h1 r90
Mechanical 1:
  lines w0.254: 48.8,0 0,0 0,62.2 48.8,62.2 ; 52.8,66.1 52.8,128.3